# EAGLE board nixie-in2-x3-mainboard (EAGLE 5.04)
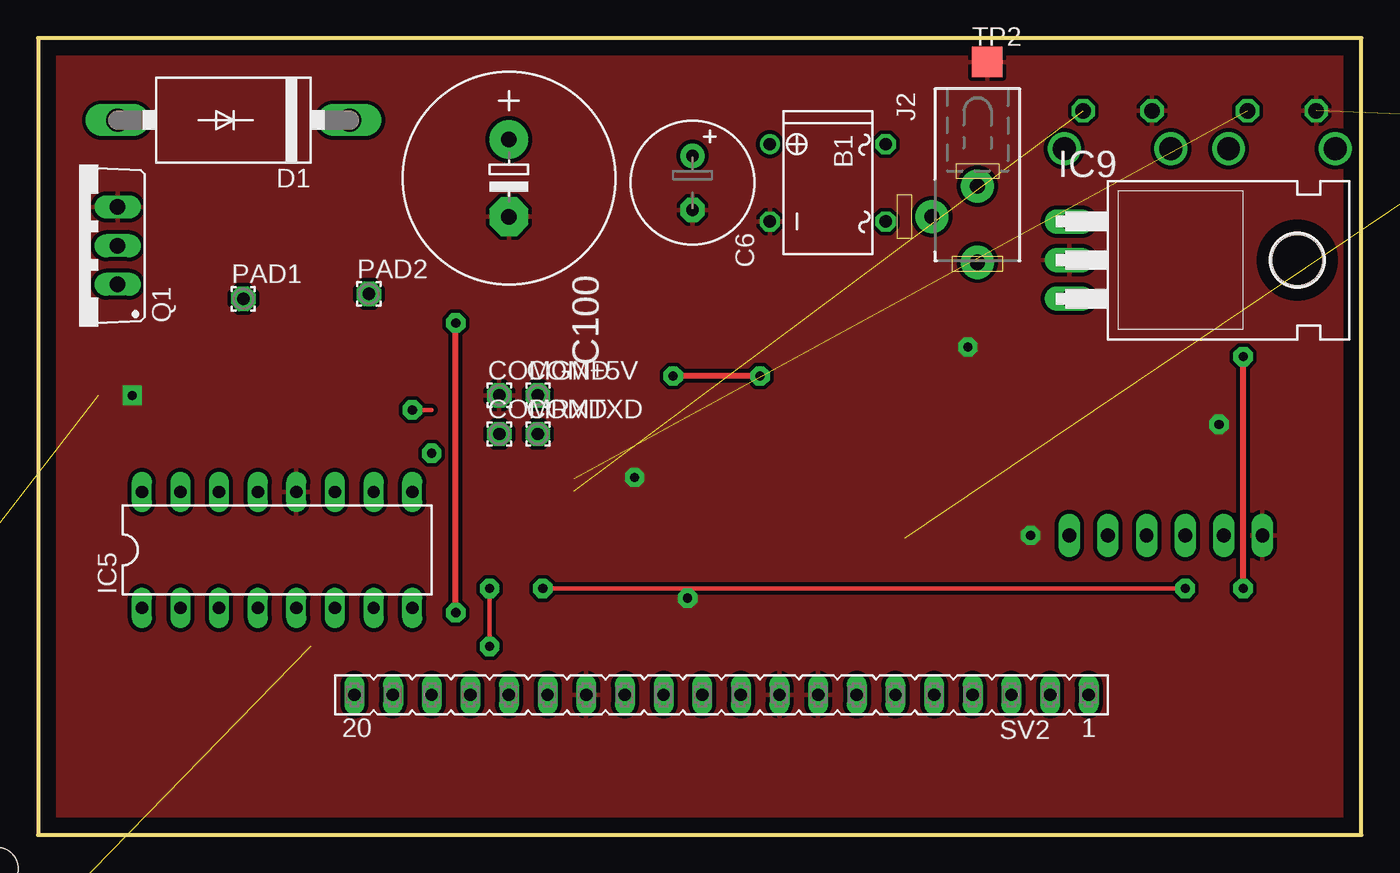
[diagram p0: board, top side]
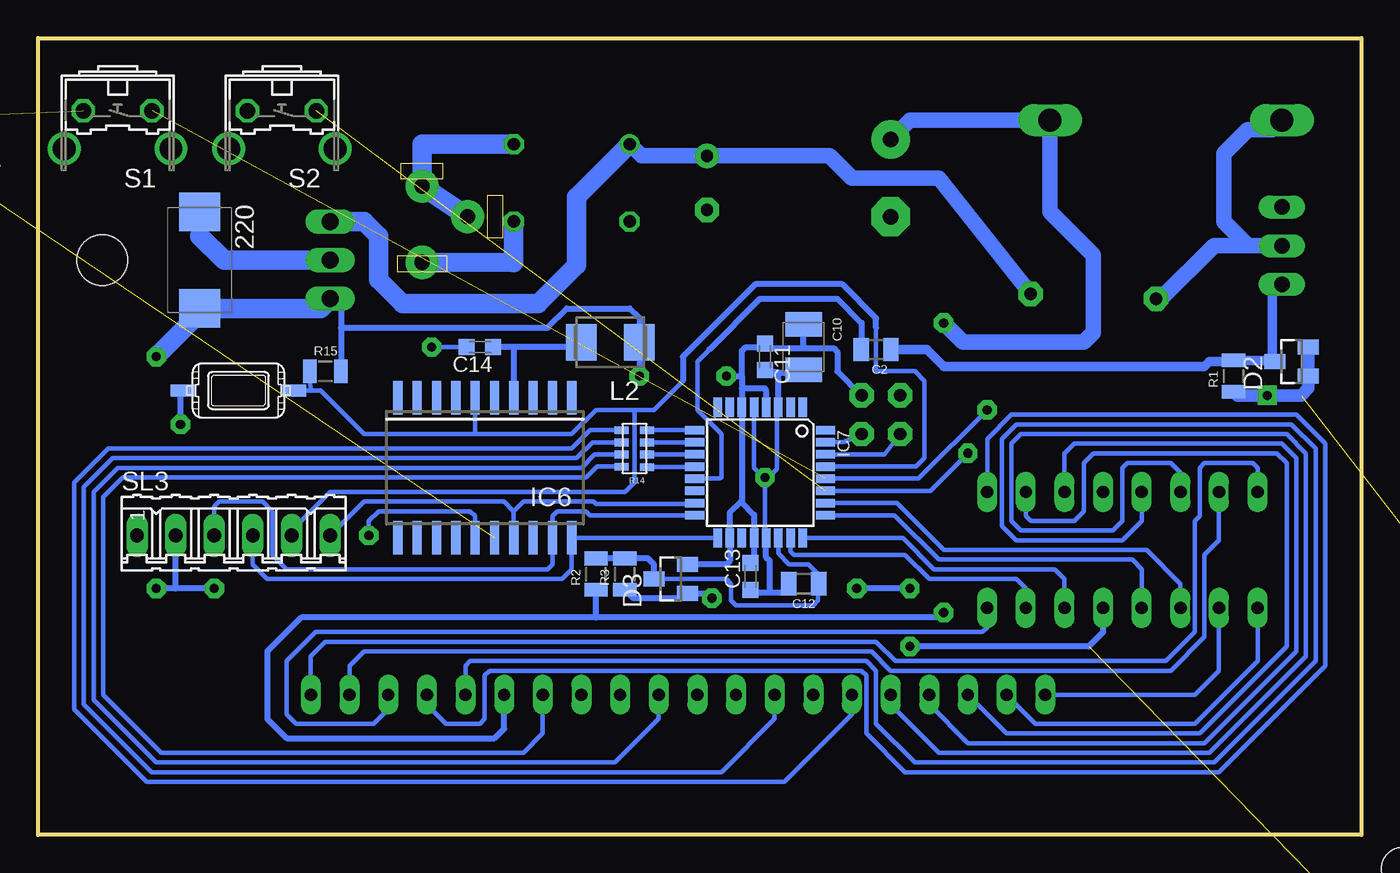
[diagram p1: board, bottom side, seen from below]

Size 86.98 x 52.38 mm. Coordinates in mm from the lower left corner, seen from the top.
Outline: 0,0 86.98,0 86.98,52.38 0,52.38 0,0
Copper layers (1*16): Top 0.035mm / dielectric 1.5mm / Bottom 0.035mm
Design rules "default *": minimum track width 10mil, minimum drill 24mil, track to track 10mil, track to pad 10mil, pad to pad 8mil, via to via 8mil, smd to smd 8mil, copper to edge 40mil, drill to drill 8mil, minimum pad ring 10mil, minimum via ring 8mil, stop-mask expansion 4mil, vias tented up to drill 0mil, thermal gap 10mil
Holes 2.8 mm at -2.71,-2.23 -2.71,72.07 90.96,72.07 91.28,-2.23
bRestrict: area 79.8,41.6 to 83.3,47.6

## Footprints (pad centres in the part's own frame; a part is rotated, then mirrored left to right if it is on the bottom)
D/7343-31R = smd 2.55 x 2.7: + 3.175,0; - -3.175,0
B-DIL = drill 0.813 round: + -2.54,-3.81 | drill 0.813 octagon: - 2.54,-3.81; AC1 2.54,3.81; AC2 -2.54,3.81
1,6/0,8 = drill 0.813 pad 1.6 octagon: 1 0,0
C0805S = smd 1.016 x 1.524: 1 -0.977,0; 2 0.977,0
SMC_B = smd 1.6 x 2.4: + -1.5,0; - 1.5,0
E3,5-8 = drill 0.813 pad 1.6 round: + -1.778,0 | drill 0.813 pad 1.6 octagon: - 1.778,0
C0603K = smd 1.05 x 1.08: 1 -0.875,0; 2 0.875,0
E5-13 = drill 1.016 pad 2.54 round: + -2.54,0 | drill 1.016 pad 2.54 octagon: - 2.54,0
DO201-15 = drill 1.499 long: A 7.62,0; C -7.62,0
SOT23 = smd 1 x 1.4: 1 -0.95,-1.1; 2 0.95,-1.1; 3 0,1.1
SOT23@1 = smd 1 x 1.4: 1 -0.95,-1.1; 2 0.95,-1.1; 3 0,1.1
DIL16 = drill 0.813 long: 1 -8.89,-3.81; 2 -6.35,-3.81; 3 -3.81,-3.81; 4 -1.27,-3.81; 5 1.27,-3.81; 6 3.81,-3.81; 7 6.35,-3.81; 8 8.89,-3.81; 9 8.89,3.81; 10 6.35,3.81; 11 3.81,3.81; 12 1.27,3.81; 13 -1.27,3.81; 14 -3.81,3.81; 15 -6.35,3.81; 16 -8.89,3.81
SO-20DW = smd 0.6 x 2.2: 1 -5.715,-4.6; 2 -4.445,-4.6; 3 -3.175,-4.6; 4 -1.905,-4.6; 5 -0.635,-4.6; 6 0.635,-4.6; 7 1.905,-4.6; 8 3.175,-4.6; 9 4.445,-4.6; 10 5.715,-4.6; 11 5.715,4.6; 12 4.445,4.6; 13 3.175,4.6; 14 1.905,4.6; 15 0.635,4.6; 16 -0.635,4.6; 17 -1.905,4.6; 18 -3.175,4.6; 19 -4.445,4.6; 20 -5.715,4.6
TQFP32-08 = smd 1.27 x 0.559: 1 -4.293,2.8; 2 -4.293,2; 3 -4.293,1.2; 4 -4.293,0.4; 5 -4.293,-0.4; 6 -4.293,-1.2; 7 -4.293,-2; 8 -4.293,-2.8; 17 4.293,-2.8; 18 4.293,-2; 19 4.293,-1.2; 20 4.293,-0.4; 21 4.293,0.4; 22 4.293,1.2; 23 4.293,2; 24 4.293,2.8 | smd 0.559 x 1.27: 9 -2.8,-4.293; 10 -2,-4.293; 11 -1.2,-4.293; 12 -0.4,-4.293; 13 0.4,-4.293; 14 1.2,-4.293; 15 2,-4.293; 16 2.8,-4.293; 25 2.8,4.293; 26 2,4.293; 27 1.2,4.293; 28 0.4,4.293; 29 -0.4,4.293; 30 -1.2,4.293; 31 -2,4.293; 32 -2.8,4.293
TO220H = drill 1.118 long: 1 -2.54,-10.16; 2 0,-10.16; 3 2.54,-10.16 | hole 3.302: 0,4.826
DCJ-SMALL = drill 1 pad 2.184 round: 1 0,3; 2 3,0; 3 0,-2
L4532M = smd 2 x 2.4: 1 -1.9,0; 2 1.9,0
TO220BV = drill 1.016 long: D 0,-2.54; G -2.54,-2.54; S 2.54,-2.54
R0805-SVO = smd 0.9 x 1.524: 1 -1.027,0; 2 1.027,0
RESSMD-YC16 = smd 0.508 x 0.914: R1$1 -1.23,-0.821; R1$2 -1.2,0.851; R2$1 -0.4,-0.821; R2$2 -0.4,0.851; R3$1 0.4,-0.821; R3$2 0.4,0.851; R4$1 1.2,-0.821; R4$2 1.2,0.851
B3F-31XX = drill 1.016 octagon: 1 -2.261,-1.245; 2 2.261,-1.245 | drill 1.499 pad 2.159 round: 3 -3.505,1.245; 4 3.505,1.245
06P = drill 0.914 long: 1 -6.35,0; 2 -3.81,0; 3 -1.27,0; 4 1.27,0; 5 3.81,0; 6 6.35,0
FE20 = drill 0.813 long: 1 -24.13,0; 2 -21.59,0; 3 -19.05,0; 4 -16.51,0; 5 -13.97,0; 6 -11.43,0; 7 -8.89,0; 8 -6.35,0; 9 -3.81,0; 10 -1.27,0; 11 1.27,0; 12 3.81,0; 13 6.35,0; 14 8.89,0; 15 11.43,0; 16 13.97,0; 17 16.51,0; 18 19.05,0; 19 21.59,0; 20 24.13,0
SW_IT1181 = smd 1.676 x 0.813: P$1 -3.61,0; P$2 3.61,0
TP20SQ = smd 2 x 2: TP 0,0

## Placement (x,y rotation side)
220  [D/7343-31R]  76.35,37.78 270 bottom
B1  [B-DIL]  51.91,42.86 270 top
BAT+  [1,6/0,8]  91.28,46.03 0 top  (outside the outline)
BAT-  [1,6/0,8]  91.28,47.3 0 top  (outside the outline)
C2  33nF  [C0805S]  31.9,31.9 180 bottom
C5  10uF  [SMC_B]  -98.27,-105.41 0 top  (outside the outline)
C6  100/24V  [E3,5-8]  43.02,42.86 270 top
C9  10uF  [SMC_B]  -103.35,-105.41 0 top  (outside the outline)
C10  10uF  [SMC_B]  36.66,32.06 270 bottom
C11  100nF  [C0603K]  39.2,31.43 270 bottom
C12  1.0  [C0805S]  36.66,16.5 180 bottom
C13  100nF  [C0603K]  40.16,16.98 90 bottom
C14  100nF  [C0603K]  57.94,32.06 180 bottom
C15  100nF  [C0603K]  -102.08,-118.11 0 top  (outside the outline)
C100  10uF/250V  [E5-13]  30.95,43.18 270 top
COM+5V  [1,6/0,8]  32.85,28.89 0 top
COMGND  [1,6/0,8]  30.31,28.89 0 top
COMRXD  [1,6/0,8]  30.31,26.35 0 top
COMTXD  [1,6/0,8]  32.85,26.35 0 top
D1  31DF6  [DO201-15]  12.85,46.98 180 top
D2  BAT54C  [SOT23]  4.6,31.11 90 bottom
D3  BAT54S  [SOT23@1]  45.4,16.82 90 bottom
IC5  74141N  [DIL16]  15.71,18.73 0 top
IC6  DS3234  [SO-20DW]  57.62,24.12 180 bottom
IC7  MEGA8-AI  [TQFP32-08]  39.52,23.81 270 bottom
IC9  7805T  [TO220H]  77.94,37.78 270 top
J2  [DCJ-SMALL]  61.75,40.64 180 top
L2  [L4532M]  49.37,32.38 180 bottom
PAD1  [1,6/0,8]  13.49,35.24 0 top
PAD2  [1,6/0,8]  21.74,35.55 0 top
Q1  IRF630N  [TO220BV]  2.69,38.73 90 top
R1  91K  [R0805-SVO]  8.41,30.16 90 bottom
R2  470K  [R0805-SVO]  50.32,17.14 90 bottom
R3  4K7  [R0805-SVO]  48.41,17.14 90 bottom
R14  [RESSMD-YC16]  47.78,25.39 90 bottom
R15  10K  [R0805-SVO]  68.1,30.47 0 bottom
S1  [B3F-31XX]  81.75,46.35 180 bottom
S2  [B3F-31XX]  70.95,46.35 180 bottom
SL3  [06P]  74.13,19.68 0 bottom
SV2  [FE20]  44.92,9.2 180 top
SW1  BUTTON-IT_1181  [SW_IT1181]  73.81,29.21 0 bottom
TP1  TPSTP20SQ  [TP20SQ]  91.59,42.86 0 bottom  (outside the outline)
TP2  TPSTP20SQ  [TP20SQ]  62.38,50.8 0 top

## Library data of the parts
220 C2 C5 C6 C9-C15 C100 L2 R1-R3 R15 = rcl
B1 = rectifier
BAT+ BAT- COM+5V COMGND COMRXD COMTXD PAD1 PAD2 = wirepad
D1-D3 = diode
IC5 = 74xx-eu
IC6 = 0-ds3234
IC7 = atmel
IC9 = linear
J2 R14 SW1 TP1 TP2 = 0-svo
Q1 = transistor-power
S1 S2 = switch-omron
SL3 = con-amp-quick
SV2 = con-lsta

## Nets
+5V: 220.+ C5.- C9.- C10.+ C11.1 C13.2 C15.2 COM+5V.1 D3.2 IC5.5 IC7.4 IC7.6 IC7.18 IC7.20 IC9.3 L2.1 R15.2 SL3.2
+UB: B1.+ C6.+ IC9.1 PAD2.1
BTN+: IC7.28 S1.1
BTNSET: IC7.27 S2.1
C0: IC5.16 SV2.1
C1: IC5.15 SV2.2
C2: IC5.8 SV2.3
C3: IC5.9 SV2.4
C4: IC5.13 SV2.5
C5: IC5.14 SV2.16
C6: IC5.11 SV2.17
C7: IC5.10 SV2.18
C8: IC5.1 SV2.19
C9: IC5.2 SV2.20
D0: IC5.3 IC7.26
D1: IC5.6 IC7.24
D2: IC5.7 IC7.23
D3: IC5.4 IC7.25
DOT: SV2.12
FBACK: C12.1 D3.3 IC7.22 R2.2 R3.2
GND: 220.- B1.- BAT-.1 C5.+ C6.- C9.+ C10.- C11.2 C12.2 C13.1 C14.2 C15.1 C100.- COMGND.1 D2.1 D2.2 D3.1 IC5.12 IC6.15 IC7.3 IC7.5 IC7.21 IC9.2 Q1.S R1.1 R3.1 S1.2 S2.2 SL3.1 SV2.8 SV2.9 SV2.14 SW1.P$1 TP2.TP
HV+: C100.+ D1.C R2.1 SV2.6
HVPUMP: C2.2 IC7.13
MISO: IC6.19 IC7.16 SL3.3
MOSI: IC6.17 IC7.15 SL3.6
N$2: IC6.18
N$3: C2.1 D2.3 Q1.G R1.2
N$7: D1.A PAD1.1 Q1.D
N$9: BAT+.1 IC6.16 TP1.TP
N$31: IC7.11 R14.R2$1
N$32: IC7.10 R14.R3$1
N$34: IC7.9 R14.R4$1
N$35: IC7.12 R14.R1$1
N$53: C14.1 IC6.4 L2.2
N$64: B1.AC2 J2.2 J2.3
N$65: B1.AC1 J2.1
RESET#: IC6.6 IC7.29 R15.1 SL3.5 SW1.P$2
RTCINT: IC6.5
RTCSEL#: IC6.1
RXD: COMRXD.1 IC7.30
SA1: R14.R1$2 SV2.7
SA2: R14.R2$2 SV2.10
SA3: R14.R3$2 SV2.13
SA4: R14.R4$2 SV2.15
SCK: IC6.20 IC7.17 SL3.4
TXD: COMTXD.1 IC7.31

## Tracks (layer width: path | path; a pad name or v marks a point on that pad's centre or on a via)
+5V  (via drill 0.6 pad 1.27)  (3 unrouted)
  Top 0.305: v29.68,12.38 v29.68,16.19 | v33.17,16.19 v75.4,16.19
  Top 0.406: v47.46,30.16 v41.74,30.16 | v79.21,16.19 v79.21,31.43
  Bottom 0.305: IC7.18 41.51,19.5 | L2.1 47.78,32.69
  Bottom 0.406: D3.2 43.98,17.77 41.74,17.77 41.51,18.01 41.51,19.5 | 39.2,31.98 34.68,31.98 34.44,31.75 34.44,30.47 COM+5V.1 | 39.2,31.98 C11.1 39.28,32.06 40.48,32.06 40.72,31.82 40.72,30.16 | 40.72,30.16 40.72,29.36 | 40.72,29.36 IC7.6 40.71,28.09 40.71,21.98 40.79,21.9 | IC7.4 39.12,29.12 39.2,29.36 40.72,29.36 | C10.+ 36.66,31.98 39.2,31.98 | v47.46,30.16 v47.47,30.16 L2.1 47.46,33.97 48.09,34.6 52.22,34.6 53.49,33.33 67.07,33.33 | v41.74,30.16 40.72,30.16 | IC7.18 41.52,21.17 40.79,21.9 | 40.79,21.9 39.92,21.03 IC7.20 39.92,17.93 C13.2 | IC9.3 67.14,35.24 67.07,35.16 67.07,33.33 | 67.07,33.33 R15.2 | 76.35,34.29 220.+ | IC5.5 16.98,13.33 17.93,12.38 v29.68,12.38 | v29.68,16.19 v33.17,16.19 | v75.4,16.19 77.94,16.19 | 77.94,16.19 v79.21,16.19 | 77.94,16.19 SL3.2
  Bottom 1.27: 220.+ 68.42,34.6 IC9.3 | v79.21,31.43 76.35,34.29
+UB
  Bottom 1.016: PAD2.1 27.77,43.18 33.49,43.18 34.95,44.64 C6.+ 47.33,44.64 B1.+
  Bottom 1.27: IC9.1 65.56,40.32 64.61,39.37 64.61,36.51 63.02,34.92 54.13,34.92 51.59,37.46 51.59,41.91 B1.+
BTN+  (via drill 0.6 pad 1.27)  (1 unrouted)
  Top 0.305: v24.6,27.93 25.87,27.93
  Bottom 0.305: IC7.28 29.13,23.41 v24.6,27.93
BTNSET  (via drill 0.6 pad 1.27)  (1 unrouted)
  Top 0.305: v25.87,25.08 25.87,25.39
  Bottom 0.305: IC7.27 28.34,22.61 v25.87,25.08
C0
  Bottom 0.305: SV2.1 69.05,11.74 68.1,12.7 31.9,12.7 30.63,11.43 12.85,11.43 10.95,13.33 10.95,20.63 10.63,20.95 10.63,24.12 10.31,24.44 7.14,24.44 6.82,24.12 IC5.16
C1
  Bottom 0.305: SV2.2 66.51,11.11 65.56,12.06 32.22,12.06 30.95,10.79 12.54,10.79 10.31,13.01 10.31,18.41 9.36,19.36 IC5.15
C2
  Bottom 0.305: SV2.3 63.97,8.25 64.92,7.3 70,7.3 70.64,7.93 70.64,11.43 68.73,13.33 24.92,13.33 24.6,13.65 IC5.8
C3
  Bottom 0.305: IC5.9 24.6,26.03 23.01,27.62 4.28,27.62 2.38,25.71 2.38,11.11 9.36,4.12 30,4.12 32.54,6.66 32.54,10.47 32.85,10.79 57.3,10.79 57.62,10.47 57.62,7.62 57.94,7.3 60.16,7.3 61.43,8.57 SV2.4
C4
  Bottom 0.305: IC5.13 14.44,20.63 15.71,19.36 22.7,19.36 23.65,20.31 23.65,26.03 22.7,26.98 4.6,26.98 3.01,25.39 3.01,11.43 9.68,4.76 29.36,4.76 31.9,7.3 31.9,10.79 32.54,11.43 58.57,11.43 58.89,11.11 SV2.5
C5
  Bottom 0.305: SV2.16 30.95,8.57 27.77,5.39 9.99,5.39 3.64,11.74 3.64,25.08 4.91,26.35 22.38,26.35 23.01,25.71 23.01,20.63 22.38,20 16.34,20 15.71,20.63 15.71,24.12 15.39,24.44 12.54,24.44 11.9,23.81 IC5.14
C6
  Bottom 0.305: SV2.17 28.41,8.57 25.87,6.03 10.31,6.03 4.28,12.06 4.28,24.76 5.23,25.71 18.89,25.71 19.52,25.08 IC5.11
C7
  Bottom 0.305: SV2.18 23.33,6.66 10.63,6.66 4.91,12.38 4.91,24.44 5.55,25.08 17.61,25.08 18.25,24.44 18.25,21.27 18.89,20.63 21.74,20.63 22.06,20.95 IC5.10
C8
  Bottom 0.305: IC5.1 6.82,11.43 10.95,7.3 21.43,7.3 SV2.19
C9
  Bottom 0.305: IC5.2 9.36,10.79 10.95,9.2 SV2.20
D0
  Bottom 0.305: IC5.3 11.9,16.5 14.12,18.73 27.46,18.73 30.54,21.81 IC7.26
D1
  Bottom 0.305: IC5.6 19.52,16.82 20.16,17.46 28.09,17.46 30.15,19.51 IC7.24
D2
  Bottom 0.305: IC5.7 22.06,16.19 22.7,16.82 28.41,16.82 30,18.41 37.3,18.41 37.52,18.63 IC7.23
D3
  Bottom 0.305: IC5.4 14.44,17.46 15.07,18.09 27.77,18.09 30.69,21.01 IC7.25
FBACK
  Bottom 0.305: C12.1 35.96,16.36 36.03,16.48 | D3.3 46.18,16.82 41.74,16.82 41.43,16.5 41.43,15.39 41.11,15.08 36.03,15.08 35.71,15.39 35.71,15.85 | 38.32,18.48 IC7.22 | 35.71,17.14 36.35,17.77 37.62,17.77 38.32,18.48 | 38.32,18.48
  Bottom 0.406: R2.2 R3.2 46.9,18.17 46.51,17.77 D3.3 | 35.71,15.85 C12.1 35.71,16.53 35.71,17.14
GND  (via drill 0.6 pad 1.27)  (4 unrouted)
  Bottom 0.305: 39.2,23.41 39.2,19.6 IC7.21 39.2,19.43 | 39.2,23.41 39.92,24.13 IC7.5 | IC7.3 38.41,28.01 38.41,24.05 39.05,23.41 39.2,23.41 | 39.2,23.41 v39.2,23.49 | IC6.15 58.26,20.95 58.57,21.27 64.61,21.27 65.24,20.63 v65.24,19.68 | C14.2 v61.11,32.06
  Bottom 0.406: v77.62,26.98 77.62,29 SW1.P$1 | R3.1 47.85,15.55 44.92,15.55 44.6,15.87 D3.1 43.02,15.87 v42.7,15.55 | C10.- 36.99,30.23 C11.2 38.41,30.23 38.33,30.16 38.33,28.11 IC7.3 | 76.35,39.37 220.- | 38.89,15.95 37.72,15.95 C12.2 | IC7.21 39.12,18.25 38.89,18.01 38.89,15.95 | 38.89,15.95 40,15.95 C13.1
  Bottom 0.813: D2.2 D2.1 3.5,29.35 3.96,28.89 v6.19,28.89 8.16,28.89 R1.1
  Bottom 1.27: IC9.2 74.77,37.78 76.35,39.37
  pour Top: -10.64,62.86 103.02,62.86 103.02,-6.67 102.39,-7.31 -9.37,-7.31 -10.01,-7.31 -10.32,-6.99 -10.96,-6.36 -10.96,62.54
HV+  (via drill 0.6 pad 1.27)
  Top 0.406: v27.46,14.6 v27.46,33.65
  Bottom 0.406: v27.46,14.6 27.77,14.28 50.32,14.28 | 50.32,14.28 69.69,14.28 71.91,12.06 71.91,7.62 70.64,6.35 56.98,6.35 56.35,6.98 SV2.6 | 50.32,14.28 R2.1
  Bottom 1.016: C100.+ 29.68,46.98 D1.C 20.47,40.95 17.61,38.09 17.61,33.02 18.25,32.38 26.19,32.38 v27.46,33.65
HVPUMP
  Bottom 0.305: IC7.13 42.15,23.41 42.06,23.49 42.06,26.35 43.65,27.93 43.65,31.11 42.86,31.9
  Bottom 0.406: 42.86,31.9 39.52,35.24 34.44,35.24 32.85,33.65 32.85,31.93 C2.2
MISO
  Bottom 0.305: IC7.16 50.69,21.01 50.95,21.27 52.86,21.27 53.17,20.95 IC6.19 53.17,17.77 53.49,17.46 70.64,17.46 71.59,18.41 71.59,21.27 72.22,21.9 75.08,21.9 75.4,21.58 SL3.3
MOSI
  Bottom 0.305: IC7.15 43.88,21.74 50.32,21.74 50.48,21.9 55.08,21.9 55.72,21.27 | 55.72,21.27 IC6.17 | SL3.6 65.56,21.9 56.35,21.9 55.72,21.27
N$3
  Bottom 0.305: R1.2 8.49,31.27 | 6.41,31.18 D2.3 5.87,30.96
  Bottom 0.61: 5.87,30.96 5.87,35.55 Q1.G | C2.1 28.57,31.9 27.46,30.79 10.31,30.79 9.99,31.11 8.48,31.11 R1.2 6.41,31.18
N$7
  Bottom 1.016: Q1.D 7.46,38.73 | 7.46,38.73 9.04,40.32 9.04,44.76 7.46,46.35 5.87,46.35 D1.A | PAD1.1 13.17,35.24 9.68,38.73 7.46,38.73
N$9  (2 unrouted)
N$31
  Bottom 0.305: IC7.11 R14.R2$1
N$32
  Bottom 0.305: IC7.10 R14.R3$1
N$34
  Bottom 0.305: IC7.9 R14.R4$1
N$35
  Bottom 0.305: IC7.12 43.86,24.16 R14.R1$1
N$53
  Bottom 0.406: 55.72,32.06 51.58,32.06 L2.2 | 55.72,32.06 C14.1 | 55.72,32.06 IC6.4
N$64
  Bottom 1.27: B1.AC2 61.75,45.4 J2.3 J2.2
N$65
  Bottom 1.27: J2.1 55.72,37.62 B1.AC1
RESET#
  Bottom 0.305: SL3.5 70.32,20 67.78,22.54 48.41,22.54 47.78,23.17 47.78,27.93 | 47.78,27.93 50.32,27.93 51.91,26.35 58.26,26.35 | 69.05,29.21 68.42,29.21 65.56,26.35 58.26,26.35 | 69.05,29.21 SW1.P$2 | 58.26,26.35 IC6.6 | IC7.29 29.28,24.21 28.73,24.76 28.73,29.84 29.36,30.47 31.9,30.47 31.9,33.33 | 44.6,29.84 46.51,27.93 47.78,27.93 | 69.05,29.21 R15.1
  Bottom 0.406: 44.6,29.84 44.6,31.43 39.84,36.19 34.13,36.19 31.9,33.97 31.9,33.33
RXD
  Bottom 0.305: IC7.30 31.34,25.01 COMRXD.1
SA1
  Bottom 0.305: R14.R1$2 50.25,24.2 50.95,23.49 81.43,23.49 82.7,22.22 82.7,9.2 78.89,5.39 55.08,5.39 53.81,6.66 SV2.7
SA2
  Bottom 0.305: R14.R2$2 50.4,24.99 51.27,24.12 81.75,24.12 83.34,22.54 83.34,8.88 79.21,4.76 49.05,4.76 46.19,7.62 SV2.10
SA3
  Bottom 0.305: R14.R3$2 50.55,25.79 51.59,24.76 82.07,24.76 83.97,22.86 83.97,8.57 79.53,4.12 42.06,4.12 38.57,7.62 SV2.13
SA4
  Bottom 0.305: R14.R4$2 50.7,26.59 51.91,25.39 82.39,25.39 84.61,23.17 84.61,8.25 79.84,3.49 37.94,3.49 33.49,7.93 SV2.15
SCK
  Bottom 0.305: IC7.17 42.33,19.52 IC6.20 51.91,17.46 52.54,16.82 71.91,16.82 72.86,17.77 SL3.4
TXD
  Bottom 0.305: IC7.31 34.03,25.81 COMTXD.1

## Text on the board
Top: PATASHNIK
SMD1: 2009